# EAGLE board proiect_pcb_v57 (EAGLE 9.7.0)
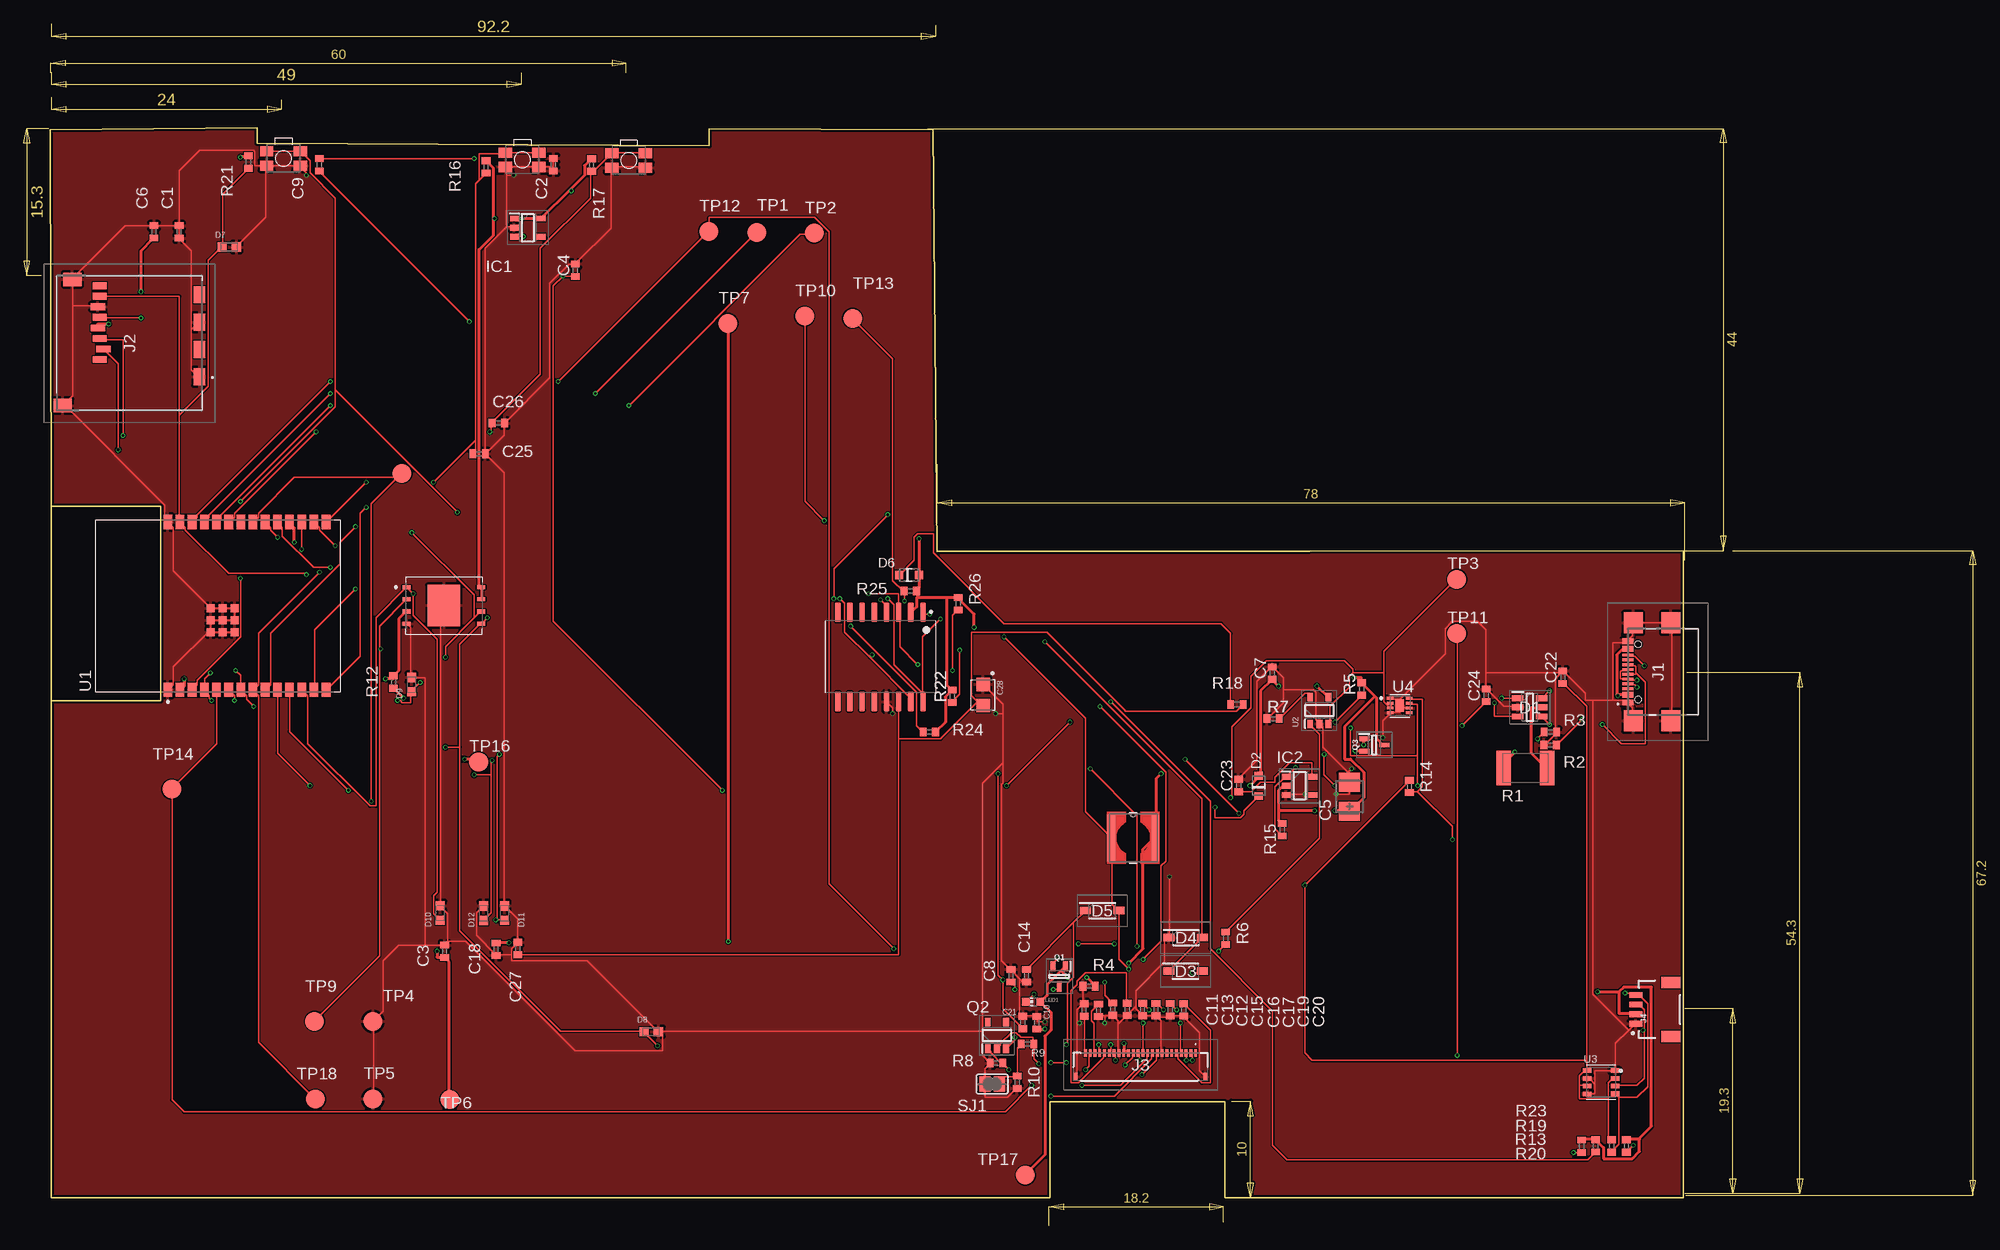
[diagram p0: board, top side]
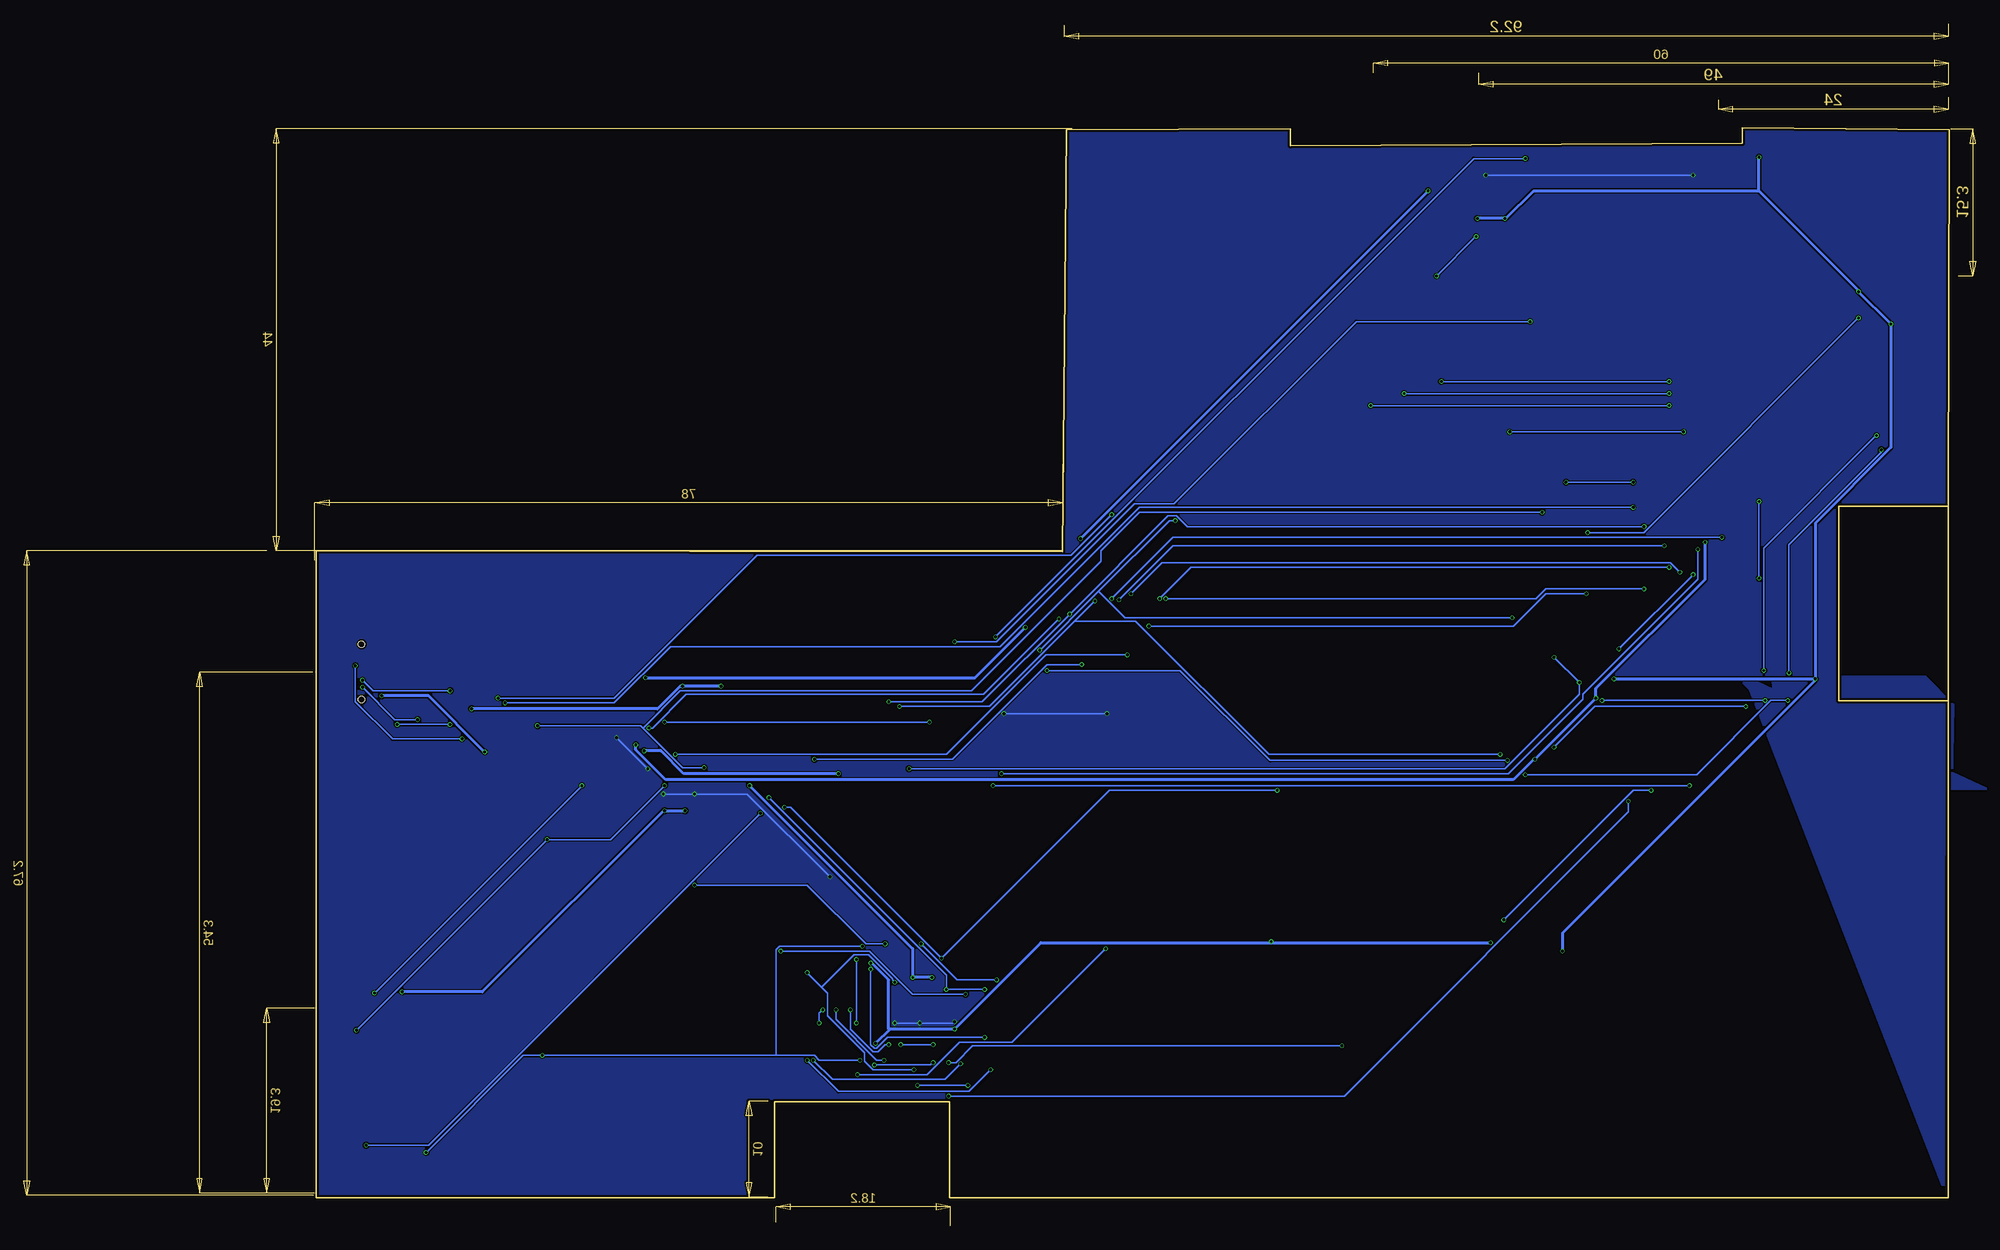
[diagram p1: board, bottom side, seen from below]

Size 170.31 x 111.58 mm. Coordinates in mm from the lower left corner, seen from the top.
Outline: 0.13,51.8 0.13,0 104.27,0 104.27,10.03 122.54,10.03 122.54,0 170.31,0 170.3,67.45 92.52,67.33 92.07,111.32 68.71,111.45 68.71,109.67 21.59,109.92 21.59,111.58 0,111.32 0.13,72.1
Outline: 0.13,51.8 0.13,72.1
Outline: 0.13,72.1 11.56,72.1 11.56,51.8 0.13,51.8
Copper layers (1*16): Top 0.035mm / dielectric 1.6mm / Bottom 0.035mm
Design rules "jlcpcb-2layers.dru": minimum track width 0.15mm, minimum drill 0.3mm, track to track 5mil, track to pad 5mil, pad to pad 5mil, via to via 5mil, smd to smd 5mil, copper to edge 0.2mm, drill to drill 6mil, minimum pad ring 10mil, minimum via ring 3mil, stop-mask expansion 4mil, vias tented up to drill 0mil, thermal gap 10mil
Net classes: 0 default: width 0.15 mm; 1 power: width 0.3 mm

## Footprints (pad centres in the part's own frame; a part is rotated, then mirrored left to right if it is on the bottom)
ESP32_WROVER_EAGLE-LTSPICE_C0402 = smd 0.7 x 0.9: 1 -0.65,0; 2 0.65,0
EAGLE-LTSPICE_C0402 = smd 0.7 x 0.9: 1 -0.65,0; 2 0.65,0
RCL_CT3528 = smd 2 x 2.2: + -1.5,0; - 1.5,0
CAPCP3225X100N = smd 1.4 x 1.4: 1 -1.1,0; 2 1.1,0
SOT95P280X145-6N = smd 1.2 x 0.6: 1 -1.25,0.95; 2 -1.25,0; 3 -1.25,-0.95; 4 1.25,-0.95; 5 1.25,0; 6 1.25,0.95
ESP32_WROVER_AVX---SD0805S020S1R0_AVX_SD0805S020S1R0_0 = smd 0.8 x 0.9: 1 -1.05,0; 2 1.05,0
SOD3716X135N = smd 1.15 x 0.8: 1 -1.75,0; 2 1.75,0
DIOC1608X36N = smd 0.97 x 0.94: 1 -0.75,0; 2 0.75,0
SOT95P280X125-5N = smd 0.9 x 0.6: 1 -1.4,0.95; 2 -1.4,0; 3 -1.4,-0.95; 4 1.4,-0.95; 5 1.4,0.95
SAMACSYS_PARTS_USB4110GFA = smd 0.3 x 1.15: A1 -3.35,3.678; A4 -2.55,3.678; A5 -1.25,3.678; A6 -0.25,3.678; A7 0.25,3.678; A8 1.25,3.678; A9 2.55,3.678; A12 3.35,3.678; B1 3.05,3.678; B4 2.25,3.678; B5 1.75,3.678; B6 0.75,3.678; B7 -0.75,3.678; B8 -1.75,3.678; B9 -2.25,3.678; B12 -3.05,3.678 | smd 2.18 x 2: MP1 -5.11,-0.827; MP2 5.11,-0.827; MP3 -5.11,3.103; MP4 5.11,3.103 | hole 0.65: -2.89,2.603; 2.89,2.603
112ATAARR03ATTEND = smd 1.8 x 1.2: G1 10.6,10.4; G2 4.9,10.4; S1 7.75,10.4; S2 2.05,10.4 | smd 1.4 x 1.9: G3 13.6,-3.85; G4 0.45,-2.85 | smd 0.7 x 1.5: P1 8.8,0; P2 7.7,0.4; P3 6.6,0; P4 5.5,-0.2; P5 4.4,0; P6 3.3,-0.2; P7 2.2,0; P8 1.1,0
FH34SRJ24S05SH99 = smd 0.3 x 0.8: 1 5.75,1.45; 2 5.25,1.45; 3 4.75,1.45; 4 4.25,1.45; 5 3.75,1.45; 6 3.25,1.45; 7 2.75,1.45; 8 2.25,1.45; 9 1.75,1.45; 10 1.25,1.45; 11 0.75,1.45; 12 0.25,1.45; 13 -0.25,1.45; 14 -0.75,1.45; 15 -1.25,1.45; 16 -1.75,1.45; 17 -2.25,1.45; 18 -2.75,1.45; 19 -3.25,1.45; 20 -3.75,1.45; 21 -4.25,1.45; 22 -4.75,1.45; 23 -5.25,1.45; 24 -5.75,1.45 | smd 0.4 x 0.8: MP1 6.75,-1.05; MP2 -6.75,-1.05
JST04_1MM_RA = smd 0.6 x 1.35: 1 -1.5,0; 2 -0.5,0; 3 0.5,0; 4 1.5,0 | smd 1.2 x 2: NC1 2.8,-3.675; NC2 -2.8,-3.675
IND_4828-WE-TPC_WRE = smd 0.889 x 4.826: 1 -2.286,0 | smd 0.762 x 4.826: 2 2.286,0
ADAFRUIT_CHIP-LED0603 = smd 0.8 x 0.8: A 0,-0.75; C 0,0.75
SOT65P210X110-3N = smd 1.05 x 0.5: 1 -1.05,0.65; 2 -1.05,-0.65; 3 1.05,0
ESP32C6_VARISTOR_CT/CN1812 = smd 1.5 x 3.6: 1 -2.25,0; 2 2.25,0
ESP32_WROVER_EAGLE-LTSPICE_R0402 = smd 0.7 x 0.9: 1 -0.65,0; 2 0.65,0
SJ = smd 1.168 x 1.6: 1 -0.762,0; 2 0.762,0
TP20R = smd 2 x 2: TP 0,0
XCVR_ESP32-C6-WROOM-1-N8 = smd 1.5 x 0.9: 1 -8.75,5.26; 2 -8.75,3.99; 3 -8.75,2.72; 4 -8.75,1.45; 5 -8.75,0.18; 6 -8.75,-1.09; 7 -8.75,-2.36; 8 -8.75,-3.63; 9 -8.75,-4.9; 10 -8.75,-6.17; 11 -8.75,-7.44; 12 -8.75,-8.71; 13 -8.75,-9.98; 14 -8.75,-11.25; 15 8.75,-11.25; 16 8.75,-9.98; 17 8.75,-8.71; 18 8.75,-7.44; 19 8.75,-6.17; 20 8.75,-4.9; 21 8.75,-3.63; 22 8.75,-2.36; 23 8.75,-1.09; 24 8.75,0.18; 25 8.75,1.45; 26 8.75,2.72; 27 8.75,3.99; 28 8.75,5.26 | smd 0.8 x 0.8: 29_1 -2.755,0.79; 29_2 -1.505,0.79; 29_3 -0.255,0.79; 29_4 -2.755,-0.46; 29_5 -1.505,-0.46; 29_6 -0.255,-0.46; 29_7 -2.755,-1.71; 29_8 -1.505,-1.71; 29_9 -0.255,-1.71
ESP32_WROVER_BME680_PSON80P300X300X100-8N = smd 1.016 x 0.5: 1 1.458,1.2; 2 1.458,0.4; 3 1.458,-0.4; 4 1.458,-1.2; 5 -1.458,-1.22; 6 -1.458,-0.4; 7 -1.458,0.4; 8 -1.458,1.2
SON50P200X200X80-9N = smd 0.76 x 0.27: 1 -0.985,0.75; 2 -0.985,0.25; 3 -0.985,-0.25; 4 -0.985,-0.75; 5 0.985,-0.75; 6 0.985,-0.25; 7 0.985,0.25; 8 0.985,0.75 | smd 0.9 x 1.3: 9 0,0
SOIC127P1032X265-16N = smd 2.05 x 0.59: 1 -4.655,4.445; 2 -4.655,3.175; 3 -4.655,1.905; 4 -4.655,0.635; 5 -4.655,-0.635; 6 -4.655,-1.905; 7 -4.655,-3.175; 8 -4.655,-4.445; 9 4.655,-4.445; 10 4.655,-3.175; 11 4.655,-1.905; 12 4.655,-0.635; 13 4.655,0.635; 14 4.655,1.905; 15 4.655,3.175; 16 4.655,4.445
SON127P600X800X80-9N = smd 0.94 x 0.44: 1 -3.895,1.905; 2 -3.895,0.635; 3 -3.895,-0.635; 4 -3.895,-1.905; 5 3.895,-1.905; 6 3.895,-0.635; 7 3.895,0.635; 8 3.895,1.905 | smd 3.4 x 4.3: 9 0,0
MYBUTTON = smd 1.4 x 1.05: 1 1.75,0.75; 2 -1.75,0.75; 3 -1.75,-0.75; 4 1.75,-0.75

## Placement (x,y rotation side)
C1  100nF  [ESP32_WROVER_EAGLE-LTSPICE_C0402]  13.47,100.7 90 top
C2  4.7uF  [ESP32_WROVER_EAGLE-LTSPICE_C0402]  52.5,107.7 90 top
C3  4.7uF  [EAGLE-LTSPICE_C0402]  41.15,25.7 90 top
C4  4.7uF  [EAGLE-LTSPICE_C0402]  54.8,96.7 90 top
C5  100uF  [RCL_CT3528]  135.5,41.81 90 top
C6  100nF  [ESP32_WROVER_EAGLE-LTSPICE_C0402]  10.85,100.7 90 top
C7  4.7uF  [ESP32_WROVER_EAGLE-LTSPICE_C0402]  127.45,54.7 90 top
C8  4.7uF  [ESP32_WROVER_EAGLE-LTSPICE_C0402]  100.21,23.15 90 top
C9  4.7uF/25V  [ESP32_WROVER_EAGLE-LTSPICE_C0402]  28.09,107.7 90 top
C10  10uF  [ESP32_WROVER_EAGLE-LTSPICE_C0402]  102.91,18.25 90 top
C11  1uF/50V  [ESP32_WROVER_EAGLE-LTSPICE_C0402]  107.83,19.58 90 top
C12  1uF/50V  [ESP32_WROVER_EAGLE-LTSPICE_C0402]  110.83,19.67 90 top
C13  1uF/50V  [ESP32_WROVER_EAGLE-LTSPICE_C0402]  109.33,19.56 90 top
C14  1uF/50V  [ESP32_WROVER_EAGLE-LTSPICE_C0402]  101.83,23.15 90 top
C15  1uF/50V  [ESP32_WROVER_EAGLE-LTSPICE_C0402]  112.33,19.64 90 top
C16  1uF/50V  [ESP32_WROVER_EAGLE-LTSPICE_C0402]  113.93,19.63 90 top
C17  1uF/50V  [ESP32_WROVER_EAGLE-LTSPICE_C0402]  115.33,19.62 90 top
C18  0.1uF/50V  [ESP32_WROVER_EAGLE-LTSPICE_C0402]  46.53,25.91 90 top
C19  1uF/50V  [ESP32_WROVER_EAGLE-LTSPICE_C0402]  116.83,19.6 90 top
C20  1uF/50V  [ESP32_WROVER_EAGLE-LTSPICE_C0402]  118.23,19.59 90 top
C21  100nF  [ESP32_WROVER_EAGLE-LTSPICE_C0402]  101.45,18.28 90 top
C22  100nF  [ESP32_WROVER_EAGLE-LTSPICE_C0402]  157.75,54.27 90 top
C23  100nF  [ESP32_WROVER_EAGLE-LTSPICE_C0402]  123.95,42.99 90 top
C24  1uF  [ESP32_WROVER_EAGLE-LTSPICE_C0402]  149.75,52.38 90 top
C25  100nF  [ESP32_WROVER_EAGLE-LTSPICE_C0402]  44.75,77.57 0 top
C26  100nF  [ESP32_WROVER_EAGLE-LTSPICE_C0402]  46.75,80.76 0 top
C27  100nF  [ESP32_WROVER_EAGLE-LTSPICE_C0402]  48.78,25.99 90 top
C28  CPH3225A  [CAPCP3225X100N]  97.3,52.43 270 top
D1  USBLC6-2SC6Y  [SOT95P280X145-6N]  154.31,51.13 0 top
D2  ESP32_WROVER_AVX---SD0805S020S1R0_AVX_SD0805S020S1R0_0_0AVX_SD0805S020S1R0_0_0  [ESP32_WROVER_AVX---SD0805S020S1R0_AVX_SD0805S020S1R0_0]  126.04,42.94 90 top
D3  MBR0530  [SOD3716X135N]  118.41,23.63 0 top
D4  MBR0530  [SOD3716X135N]  118.45,27.13 0 top
D5  MBR0530  [SOD3716X135N]  109.71,29.94 0 top
D6  ESP32_WROVER_AVX---SD0805S020S1R0_AVX_SD0805S020S1R0_0_0AVX_SD0805S020S1R0_0_0  [ESP32_WROVER_AVX---SD0805S020S1R0_AVX_SD0805S020S1R0_0]  89.58,64.93 0 top
D7  PGB1010603MR  [DIOC1608X36N]  18.7,99.12 0 top
D8  PGB1010603MR  [DIOC1608X36N]  62.7,17.31 0 top
D9  PGB1010603MR  [DIOC1608X36N]  37.7,53.5 90 top
D10  PGB1010603MR  [DIOC1608X36N]  40.7,29.69 90 top
D11  PGB1010603MR  [DIOC1608X36N]  47.4,29.68 90 top
D12  PGB1010603MR  [DIOC1608X36N]  45.2,29.67 90 top
IC1  XC6220A331MR-G  [SOT95P280X125-5N]  49.82,101.13 0 top
IC2  BD5229G-TR  [SOT95P280X125-5N]  130.29,42.95 0 top
J1  SAMACSYS_PARTS_USB4110-GF-A  [SAMACSYS_PARTS_USB4110GFA]  168.2,54.83 90 top
J2  112A-TAAR-R03_ATTEND  [112ATAARR03ATTEND]  5.19,96.19 270 top
J3  FH34SRJ-24S-0.5SH_99_  [FH34SRJ24S05SH99]  113.72,13.66 0 top
J4  QWIIC_RIGHT_ANGLE  [JST04_1MM_RA]  165.35,19.64 90 top
L1  68uH  [IND_4828-WE-TPC_WRE]  112.96,37.52 0 top
LED1  [ADAFRUIT_CHIP-LED0603]  102.52,20.43 90 top
Q1  20V/4.2A/52mΩ/1.4W  [SOT65P210X110-3N]  105.25,23.08 270 top
Q2  SI1308EDL-T1-GE3  [SOT95P280X125-5N]  98.74,16.94 90 top
Q3  20V/4.2A/52mΩ/1.4W  [SOT65P210X110-3N]  138.1,47.21 0 top
R1  ESP32C6_VARISTORCN1812  [ESP32C6_VARISTOR_CT/CN1812]  153.85,44.81 0 top
R2  5k1  [ESP32_WROVER_EAGLE-LTSPICE_R0402]  156.43,47.19 0 top
R3  5k1  [ESP32_WROVER_EAGLE-LTSPICE_R0402]  156.45,48.55 0 top
R4  100K  [ESP32_WROVER_EAGLE-LTSPICE_R0402]  108.36,22.05 0 top
R5  10K  [ESP32_WROVER_EAGLE-LTSPICE_R0402]  136.77,53.05 90 top
R6  200  [ESP32_WROVER_EAGLE-LTSPICE_R0402]  122.61,27.05 90 top
R7  2K  [ESP32_WROVER_EAGLE-LTSPICE_R0402]  127.54,49.95 0 top
R8  10K  [ESP32_WROVER_EAGLE-LTSPICE_R0402]  98.69,14.05 0 top
R9  0.47  [ESP32_WROVER_EAGLE-LTSPICE_R0402]  101.93,16.05 0 top
R10  2.2  [ESP32_WROVER_EAGLE-LTSPICE_R0402]  100.85,12.05 90 top
R12  10K  [ESP32_WROVER_EAGLE-LTSPICE_R0402]  35.83,53.78 90 top
R13  10K  [ESP32_WROVER_EAGLE-LTSPICE_R0402]  162.85,5.4 90 top
R14  10K  [ESP32_WROVER_EAGLE-LTSPICE_R0402]  141.75,42.89 90 top
R15  10K  [ESP32_WROVER_EAGLE-LTSPICE_R0402]  128.48,38.38 90 top
R16  10K  [ESP32_WROVER_EAGLE-LTSPICE_R0402]  45.48,107.47 90 top
R17  10K  [ESP32_WROVER_EAGLE-LTSPICE_R0402]  56.48,107.66 90 top
R18  15  [ESP32_WROVER_EAGLE-LTSPICE_R0402]  123.78,51.42 0 top
R19  10K  [ESP32_WROVER_EAGLE-LTSPICE_R0402]  161.18,5.41 90 top
R20  10K  [ESP32_WROVER_EAGLE-LTSPICE_R0402]  164.38,5.4 90 top
R21  10K  [ESP32_WROVER_EAGLE-LTSPICE_R0402]  20.7,107.99 90 top
R22  10K  [ESP32_WROVER_EAGLE-LTSPICE_R0402]  94.1,52.28 90 top
R23  10K  [ESP32_WROVER_EAGLE-LTSPICE_R0402]  159.7,5.37 90 top
R24  10K  [ESP32_WROVER_EAGLE-LTSPICE_R0402]  91.7,48.56 0 top
R25  10K  [ESP32_WROVER_EAGLE-LTSPICE_R0402]  89.7,63.25 0 top
R26  10K  [ESP32_WROVER_EAGLE-LTSPICE_R0402]  94.7,61.94 90 top
SJ1  [SJ]  98.25,11.86 0 top
TP1  TPTP20R  [TP20R]  73.7,100.64 0 top
TP2  TPTP20R  [TP20R]  79.7,100.56 0 top
TP3  TPTP20R  [TP20R]  146.7,64.48 0 top
TP4  TPTP20R  [TP20R]  33.7,18.4 0 top
TP5  TPTP20R  [TP20R]  33.7,10.32 0 top
TP6  TPTP20R  [TP20R]  41.7,10.24 0 top
TP7  TPTP20R  [TP20R]  70.7,91.16 0 top
TP9  TPTP20R  [TP20R]  27.6,18.4 0 top
TP10  TPTP20R  [TP20R]  78.7,91.92 0 top
TP11  TPTP20R  [TP20R]  146.7,58.84 0 top
TP12  TPTP20R  [TP20R]  68.7,100.76 0 top
TP13  TPTP20R  [TP20R]  83.7,91.68 0 top
TP14  TPTP20R  [TP20R]  12.7,42.6 0 top
TP15  TPTP20R  [TP20R]  36.7,75.52 0 top
TP16  TPTP20R  [TP20R]  44.7,45.44 0 top
TP17  TPTP20R  [TP20R]  101.7,2.36 0 top
TP18  TPTP20R  [TP20R]  27.7,10.28 0 top
U1  ESP32-C6-WROOM-1-N8  [XCVR_ESP32-C6-WROOM-1-N8]  17.54,61.71 90 top
U2  ESP32_WROVER_SPARKFUN-IC-POWER_MCP73831  [SOT95P280X125-5N]  132.37,50.81 90 top
U3  ESP32_WROVER_BME680_BME680  [ESP32_WROVER_BME680_PSON80P300X300X100-8N]  161.75,12.05 0 top
U4  MAX17048G+T10  [SON50P200X200X80-9N]  140.75,51.31 0 top
U5  DS3231SN#  [SOIC127P1032X265-16N]  86.59,56.39 270 top
U6  W25Q512JVEIQ  [SON127P600X800X80-9N]  41.08,61.75 0 top
U$1  BUTTON_CUSYOMV1  [MYBUTTON]  24.35,108.34 180 top
U$2  BUTTON_CUSYOMV1  [MYBUTTON]  49.25,108.21 180 top
U$3  BUTTON_CUSYOMV1  [MYBUTTON]  60.34,108.15 180 top

## Library data of the parts
C1-C4 C6-C27 = DeskAssistant_v19_v1; SPICEMODEL: NONE; SPICEPREFIX: C
C5 = DeskAssistant_v19_v1; SPICEPREFIX: C
C28 = DeskAssistant_v19_v1; AVAILABILITY: Not in stock; CHECK_PRICES: https://www.snapeda.com/parts/CPH3225A/Seiko+Instruments/view-part/?ref=eda; DESCRIPTION: 11 mF (EDLC) Supercapacitor 3.3 V 1210 (3225 Metric) - -; MF: Seiko Instruments; MP: CPH3225A; PACKAGE: 1210 Seiko; PRICE: None; PURCHASE-URL: https://www.snapeda.com/api/url_track_click_mouser/?unipart_id=562593&manufacturer=Seiko Instruments&part_name=CPH3225A&search_term=None; SNAPEDA_LINK: https://www.snapeda.com/parts/CPH3225A/Seiko+Instruments/view-part/?ref=snap
D1 = DeskAssistant_v19_v1; AVAILABILITY: In Stock; CHECK_PRICES: https://www.snapeda.com/parts/USBLC6-2SC6Y/STMicroelectronics/view-part/?ref=eda; DESCRIPTION: 17V Clamp 5A (8/20µs) Ipp Tvs Diode Surface Mount SOT-23-6; MF: STMicroelectronics; MP: USBLC6-2SC6Y; PACKAGE: SOT-23-6 STMicroelectronics; PRICE: None; SNAPEDA_LINK: https://www.snapeda.com/parts/USBLC6-2SC6Y/STMicroelectronics/view-part/?ref=snap
D2 D6 = DeskAssistant_v19_v1; CENTROID_NOT_SPECIFIED: No; DATASHEET: http://datasheets.avx.com/schottky.pdf; DIGIKEY_DESCRIPTION: DIODE SCHOTTKY 20V 1A 0805; DIGIKEY_PART_NUMBER: 478-7800-1-ND; LEAD_FREE: yes; MF: AVX; MOUSER_PART_NUMBER: 581-SD0805S020S1R0; PACKAGE: 0805 (2012 metric); PREFIX: D; ROHS: yes; TEMPERATURE_RANGE_HIGH: +125°C; TEMPERATURE_RANGE_LOW: -55°C
D3-D5 = DeskAssistant_v19_v1; AVAILABILITY: In Stock; CHECK_PRICES: https://www.snapeda.com/parts/MBR0530/Onsemi/view-part/?ref=eda; DESCRIPTION: Diode Schottky 30 V 500mA Surface Mount SOD-123; MF: ON Semiconductor; MP: MBR0530; PACKAGE: SOD-123-2 ON Semiconductor; PRICE: None; PURCHASE-URL: https://www.snapeda.com/api/url_track_click_mouser/?unipart_id=179458&manufacturer=ON Semiconductor&part_name=MBR0530&search_term=None; SNAPEDA_LINK: https://www.snapeda.com/parts/MBR0530/Onsemi/view-part/?ref=snap
D7-D12 = DeskAssistant_v19_v1; AVAILABILITY: In Stock; CHECK_PRICES: https://www.snapeda.com/parts/PGB1010603MR/Littelfuse/view-part/?ref=eda; DESCRIPTION: 150V (Typ) Clamp - Ipp Tvs Diode Surface Mount 0603 (1608 Metric); MF: Littelfuse Inc.; MP: PGB1010603MR; PACKAGE: 0603 Littelfuse Inc.; PRICE: None; PURCHASE-URL: https://www.snapeda.com/api/url_track_click_mouser/?unipart_id=5659453&manufacturer=Littelfuse Inc.&part_name=PGB1010603MR&search_term=None; SNAPEDA_LINK: https://www.snapeda.com/parts/PGB1010603MR/Littelfuse/view-part/?ref=snap
IC1 = DeskAssistant_v19_v1; DESCRIPTION: LDO Voltage Regulators; HEIGHT: 1.2mm; MANUFACTURER_NAME: Torex; MANUFACTURER_PART_NUMBER: XC6220A331MR-G; MOUSER_PART_NUMBER: 865-XC6220A331MR-G; MOUSER_PRICE-STOCK: https://www.mouser.co.uk/ProductDetail/Torex-Semiconductor/XC6220A331MR-G?qs=AsjdqWjXhJ8ZSWznL1J0gg%3D%3D
IC2 = DeskAssistant_v19_v1; DESCRIPTION: Voltage Detector with Adjustable Delay Time: CMOS processes are utilized to develop high precision, low current consumption CMOS reset ICs that allow arbitrary setting of the delay time. The extensive lineup includes both Nch Open Drain and CMOS output types in a wide range of detection voltages (from 2.3V to 6.0V, in 0.1V steps), enabling selection of the ideal solution based on customer requirements. In addition, the entire series is of course both lead-free and RoHS-compliant.; HEIGHT: 1.25mm; MANUFACTURER_NAME: ROHM Semiconductor; MANUFACTURER_PART_NUMBER: BD5229G-TR; MOUSER_PART_NUMBER: 755-BD5229G-TR; MOUSER_PRICE-STOCK: https://www.mouser.co.uk/ProductDetail/ROHM-Semiconductor/BD5229G-TR?qs=4kLU8WoGk0vvnhrrYwdszw%3D%3D
J1 = DeskAssistant_v19_v1; DESCRIPTION: CONN USB 2.0 TYPE-C R/A SMT; HEIGHT: 3.26mm; MANUFACTURER_NAME: GCT (GLOBAL CONNECTOR TECHNOLOGY); MANUFACTURER_PART_NUMBER: USB4110-GF-A; MOUSER_PART_NUMBER: 640-USB4110-GF-A; MOUSER_PRICE-STOCK: https://www.mouser.co.uk/ProductDetail/GCT/USB4110-GF-A?qs=KUoIvG%2F9IlYiZvIXQjyJeA%3D%3D
J2 = DeskAssistant_v19_v1; DESCRIPTION: Micro SD Card Socket, Push-Push Type, Top Mount, SMT, H=1.83mm, 10u; HEIGHT: 1.9mm; MANUFACTURER_NAME: ATTEND; MANUFACTURER_PART_NUMBER: 112A-TAAR-R03 ATTEND
J3 = DeskAssistant_v19_v1; DESCRIPTION: 24 Position FFC, FPC Connector Contacts, Top and Bottom 0.020" (0.50mm) Surface Mount, Right Angle; HEIGHT: 1.1mm; MANUFACTURER_NAME: Hirose; MANUFACTURER_PART_NUMBER: FH34SRJ-24S-0.5SH(99); MOUSER_PART_NUMBER: 798-FH34SRJ24S05SH99; MOUSER_PRICE-STOCK: https://www.mouser.co.uk/ProductDetail/Hirose-Connector/FH34SRJ-24S-0.5SH99?qs=vcbW%252B4%252BSTIpKBl5ap9J8Fw%3D%3D
J4 = DeskAssistant_v19_v1; PROD_ID: CONN-13694
L1 = DeskAssistant_v19_v1; COPYRIGHT: Copyright (C) 2024 Ultra Librarian. All rights reserved.; MANUFACTURER_PART_NUMBER: 744043680; MFR_NAME: Wurth Electronics
LED1 R1 SJ1 TP1-TP7 TP9-TP18 U$1-U$3 = DeskAssistant_v19_v1
Q1 Q3 = DeskAssistant_v19_v1; PROD_ID: TRAN-14388
Q2 = DeskAssistant_v19_v1; AVAILABILITY: In Stock; CHECK_PRICES: https://www.snapeda.com/parts/SI1308EDL-T1-GE3/Vishay+Siliconix/view-part/?ref=eda; DESCRIPTION: Si1308EDL-T1-GE3 N-channel MOSFET Transistor, 1.5 A, 30 V, 3-Pin SC-70 | Siliconix / Vishay SI1308EDL-T1-GE3; MF: Vishay Siliconix; MP: SI1308EDL-T1-GE3; PACKAGE: SOT-323 Vishay Semiconductor; PRICE: None; PURCHASE-URL: https://www.snapeda.com/api/url_track_click_mouser/?unipart_id=274603&manufacturer=Vishay Siliconix&part_name=SI1308EDL-T1-GE3&search_term=None; SNAPEDA_LINK: https://www.snapeda.com/parts/SI1308EDL-T1-GE3/Vishay+Siliconix/view-part/?ref=snap
R2-R10 R12-R26 = DeskAssistant_v19_v1; SPICEMODEL: NONE; SPICEPREFIX: R
U1 = DeskAssistant_v19_v1; AVAILABILITY: In Stock; CHECK_PRICES: https://www.snapeda.com/parts/ESP32-C6-WROOM-1-N8/Espressif+Systems/view-part/?ref=eda; DESCRIPTION: Multiprotocol Modules ESP32-C6 module, Wi-Fi 6 in 2.4 GHz band, Bluetooth 5, Zigbee 3.0 and Thread. ESP34-WROOM Compatible - ENGINEERING SAMPLE; MF: Espressif Systems; MP: ESP32-C6-WROOM-1-N8; PACKAGE: None; PRICE: None; SNAPEDA_LINK: https://www.snapeda.com/parts/ESP32-C6-WROOM-1-N8/Espressif+Systems/view-part/?ref=snap
U2 = DeskAssistant_v19_v1; PROD_ID: IC-09995
U3 = DeskAssistant_v19_v1; AVAILABILITY: Unavailable; DESCRIPTION: Integrated Environmental Unit; MF: Bosch Sensortec; MP: BME680; PACKAGE: LGA-8 Bosch Tools; PRICE: None
U4 = DeskAssistant_v19_v1; AVAILABILITY: In Stock; CHECK_PRICES: https://www.snapeda.com/parts/MAX17048G+T10/Analog+Devices/view-part/?ref=eda; DESCRIPTION: 3µA 1-Cell/2-Cell Fuel Gauge with ModelGauge; MF: Analog Devices; MP: MAX17048G+T10; PACKAGE: TDFN-8 Maxim; PRICE: None; PURCHASE-URL: https://www.snapeda.com/api/url_track_click_mouser/?unipart_id=329239&manufacturer=Analog Devices&part_name=MAX17048G+T10&search_term=None; SNAPEDA_LINK: https://www.snapeda.com/parts/MAX17048G+T10/Analog+Devices/view-part/?ref=snap
U5 = DeskAssistant_v19_v1; AVAILABILITY: In Stock; CHECK_PRICES: https://www.snapeda.com/parts/DS3231SN%23/Analog+Devices/view-part/?ref=eda; DESCRIPTION: Extremely Accurate I²C-Integrated RTC/TCXO/Crystal; MF: Analog Devices; MP: DS3231SN#; PACKAGE: SOIC-16 Maxim; PRICE: None; PURCHASE-URL: https://www.snapeda.com/api/url_track_click_mouser/?unipart_id=99048&manufacturer=Analog Devices&part_name=DS3231SN#&search_term=None; SNAPEDA_LINK: https://www.snapeda.com/parts/DS3231SN%23/Analog+Devices/view-part/?ref=snap
U6 = DeskAssistant_v19_v1; AVAILABILITY: In Stock; CHECK_PRICES: https://www.snapeda.com/parts/W25Q512JVEIQ/Winbond+Electronics/view-part/?ref=eda; DESCRIPTION: FLASH - NOR Memory IC 512Mb (64M x 8) SPI - Quad I/O 133 MHz 8-WSON (8x6); MF: Winbond Electronics; MP: W25Q512JVEIQ; PACKAGE: Package; PRICE: None; SNAPEDA_LINK: https://www.snapeda.com/parts/W25Q512JVEIQ/Winbond+Electronics/view-part/?ref=snap

## Nets
3V3 [power]: C3.1 C5.+ C6.1 D6.2 IC1.5 IC2.2 J2.P4 J4.2 Q3.3 R5.2 R12.2 R15.2 R16.2 R17.2 R19.2 R20.2 R21.2 R22.2 R23.2 R24.2 R25.2 R26.2 TP6.TP U1.2 U5.2 U6.3 U6.7 U6.8
32KHZ: R19.1 U1.9 U5.1
DN: D1.6 J1.A7 J1.B7
DP: D1.4 J1.A6 J1.B6
EPD_3V3 [power]: C10.1 C18.2 J3.15 J3.16 L1.2 Q3.2 TP7.TP
EPD_3V3_C [power]: Q3.1 R12.1 TP16.TP U1.18
EPD_BUSY: J3.9 TP12.TP U1.26
EPD_CS: D11.1 J3.12 R25.1 TP13.TP U1.11
EPD_DC: J3.11 TP14.TP U1.5
EPD_RST: J3.10 TP15.TP U1.21
FLASH_CS: D10.1 R24.1 U1.12 U6.1
GDR: J3.2 Q2.1 R8.2
GND: C1.1 C1.2 C2.1 C2.2 C3.2 C4.2 C5.- C6.2 C7.2 C8.2 C10.2 C11.2 C12.1 C13.1 C14.1 C15.1 C16.1 C17.1 C18.1 C19.1 C20.1 C21.2 C22.2 C23.2 C24.2 C25.2 C26.2 C27.2 C28.1 D1.2 D4.1 D7.2 D8.2 D9.2 D10.2 D11.2 D12.2 IC1.2 IC2.3 J1.A1 J1.A12 J1.B1 J1.B12 J1.MP1 J1.MP2 J1.MP3 J1.MP4 J2.G1 J2.G2 J2.G3 J2.G4 J2.P6 J3.8 J3.17 J3.MP1 J3.MP2 J4.1 R2.1 R3.2 R4.1 R7.1 R8.1 R10.1 SJ1.1 TP4.TP TP5.TP U1.1 U1.28 U1.29_1 U1.29_2 U1.29_3 U1.29_4 U1.29_5 U1.29_6 U1.29_7 U1.29_8 U1.29_9 U2.2 U3.1 U3.5 U3.7 U4.1 U4.4 U4.6 U4.9 U5.13 U6.4 U6.9 U$1.1 U$1.2 U$2.1 U$2.2 U$3.1 U$3.2
GPIO8: R5.1 U1.10
I2C_PW: C21.1 C22.1 R13.2 R14.2 U1.17 U3.2 U3.6 U3.8
INT_RTC: R20.1 TP18.TP U1.8 U5.3
IO/BOOT: C25.1 R16.1 U1.15 U$2.3 U$2.4
IO/CHANGE: C26.1 R17.1 U1.23 U$3.3 U$3.4
MISO: D7.1 J2.P7 R21.1 TP9.TP U1.27 U6.2
MOSI: D8.1 J2.P3 J3.14 R22.1 TP10.TP U1.7 U6.5
N$1: J1.A5 R2.2
N$2: J1.B5 R3.1
N$3: C11.1 J3.24
N$12: C4.1 D2.1 IC1.1 IC1.3 Q1.2
N$43: R6.2 U2.1
N$44: LED1.C R6.1
N$45: R7.2 U2.5
N$49: C9.1 D3.1 D4.2
N$60: C13.2 J3.22
N$62: C15.2 J3.20
N$63: C16.2 J3.19
N$64: C17.2 J3.18
N$66: C19.2 J3.4
N$75: C20.2 J3.5
N$85: C23.1 IC2.5
N$98: D6.1 R18.1
PREVGH: C14.2 D5.1 J3.21
PREVGL: C12.2 D3.2 J3.23
RESE: J3.3 Q2.2 R9.2
RESE': R9.1 R10.2 SJ1.2
RESET: C24.1 IC2.1 R15.1 U1.3 U$1.3 U$1.4
RTC_RST: U1.16 U5.4
RX: TP2.TP U1.24
SCK: D9.1 J2.P5 J3.13 R23.1 TP11.TP U1.6 U6.6
SCL: J4.4 R13.1 U1.20 U3.4 U4.7 U5.16
SDA: J4.3 R14.1 U1.19 U3.3 U4.8 U5.15
SRC: C9.2 D5.2 L1.1 Q2.3
SS_SD: D12.1 J2.P2 R26.1 U1.4
TX: TP1.TP U1.25
USB_D+: D1.3 U1.14
USB_D-: D1.1 U1.13
VBAT: C8.1 Q1.3 TP3.TP U2.3 U4.2 U4.3
VBUS [power]: C7.1 D1.5 D2.2 LED1.A Q1.1 R1.2 R4.2 TP17.TP U2.4
VRTC: C27.1 C28.2 R18.2 U5.14
VUSB [power]: J1.A4 J1.A9 J1.B4 J1.B9 R1.1

## Tracks (layer width: path | path; a pad name or v marks a point on that pad's centre or on a via)
3V3  (via drill 0.3)
  Top 0.3: R23.2 159.74,6.09 161.11,6.09 R19.2 161.24,5.97 161.99,5.22 161.99,4.09 164.99,4.09 165.74,4.84 165.74,6.09 | 165.74,6.09 164.49,6.09 R20.2 | 163.61,21.47 163.61,19.22 165.24,19.22 J4.2 | 163.61,21.47 164.11,21.97 166.99,21.97 166.99,7.47 165.74,6.22 165.74,6.09 | R24.2 92.36,48.59 93.36,49.59 93.36,52.22 93.99,52.84 R22.2 93.99,52.97 93.49,53.47 93.49,62.59 | 90.49,62.59 93.49,62.59 | 93.49,62.59 94.61,62.59 R26.2 94.74,62.47 96.36,60.84 v96.36,59.47 | 90.49,62.59 90.49,63.22 R25.2 90.36,63.34 90.61,63.59 90.61,64.84 D6.2 90.61,64.97 v90.61,68.72 | U5.2 89.86,61.09 90.36,61.59 90.36,62.59 90.49,62.59 | 128.11,40.34 128.11,42.47 128.49,42.84 128.86,42.84 IC2.2 | 128.11,40.34 128.11,39.34 128.36,39.09 R15.2 | 138.17,52.28 138.36,52.09 138.36,47.84 139.11,47.09 Q3.3 | 138.17,52.28 136.86,53.59 R5.2 136.74,53.84 136.74,54.22 v135.99,54.22 | 138.17,52.28 134.99,49.09 134.99,45.72 135.61,45.72 136.99,44.34 136.99,41.72 135.61,40.34 C5.+ 135.36,40.34 v133.99,40.34 | v131.86,40.34 128.11,40.34 | v161.36,21.47 163.61,21.47 | TP6.TP 41.61,10.34 41.61,24.59 41.24,24.97 C3.1 41.11,25.09 40.36,25.09 v40.36,25.72 | U6.3 37.11,61.09 36.36,60.34 36.36,54.97 35.86,54.47 R12.2 35.74,54.34 35.74,54.09 v34.99,54.09 | v13.99,54.09 13.99,53.34 13.61,52.97 U1.2 | v9.49,94.47 9.49,98.72 10.74,99.97 C6.1 | v6.11,91.09 4.99,91.09 4.99,90.72 J2.P4 | v19.86,108.47 19.86,108.59 20.61,108.59 R21.2 | 54.18,105.03 55.74,106.59 55.74,107.59 56.36,108.22 R17.2 | 54.18,105.03 51.24,102.09 IC1.5 51.11,102.09 v49.24,102.09 | 46.24,102.09 46.24,100.34 44.74,98.84 44.74,63.84 44.86,63.72 U6.8 44.99,63.59 44.99,62.47 U6.7
  Top 0.3: 46.24,102.09 46.24,107.34 45.49,108.09 R16.2 | v46.36,102.09 46.24,102.09 | v54.36,104.97 54.24,104.97 54.18,105.03
  Bottom 0.3: v131.86,40.34 v133.99,40.34 134.11,40.34 152.99,21.47 v161.36,21.47 | v96.36,59.47 101.61,54.22 v135.99,54.22 | v34.99,54.09 v13.99,54.09 | v40.36,25.72 40.36,27.59 13.99,53.97 v13.99,54.09 | 19.86,104.97 v19.86,108.47 | 19.86,104.97 9.49,94.59 v9.49,94.47 v6.11,91.09 6.11,78.22 13.99,70.34 v13.99,54.09 | v49.24,102.09 v46.36,102.09 46.24,102.09 43.36,104.97 19.86,104.97 | v54.36,104.97 v90.61,68.72
32KHZ  (via drill 0.3)
  Top 0.15: v110.61,51.72 120.99,41.34 120.99,25.97 127.49,19.47 127.49,5.47 128.99,3.97 160.36,3.97 161.11,4.72 R19.1 | v91.74,60.84 91.11,60.84 91.11,60.97 U5.1 | v31.86,69.97 30.24,68.34 30.24,66.09 22.99,58.84 22.99,53.47 22.49,52.97 U1.9
  Bottom 0.15: v110.61,51.72 100.86,51.72 v91.74,60.84 81.49,71.09 80.61,71.09 79.49,69.97 v31.86,69.97
DN  (via drill 0.3)
  Top 0.15: J1.A7 164.49,54.97 163.86,54.97 163.74,54.84 163.74,54.09 164.49,54.09 J1.B7 164.61,53.97 v165.49,53.97 | v156.36,52.84 155.61,52.09 D1.6
  Bottom 0.15: v156.36,52.84 164.36,52.84 v165.49,53.97
DP  (via drill 0.3)
  Top 0.15: 165.36,54.72 165.36,55.34 165.24,55.47 164.61,55.47 J1.B6 | 165.36,54.72 165.36,54.59 164.61,54.59 J1.A6 | v156.36,49.34 155.61,50.09 D1.4 | v161.86,49.34 163.86,47.34 166.36,47.34 166.36,53.72 165.36,54.72
  Bottom 0.15: v161.86,49.34 v156.36,49.34
EPD_3V3  (via drill 0.3)
  Top 0.3: v136.11,46.59 136.99,46.59 Q3.2 | v115.86,44.22 115.36,43.72 115.36,37.59 L1.2 115.11,37.47 113.99,36.34 113.99,25.97 v112.49,24.47 | J3.15 112.36,15.22 111.99,15.22 J3.16 111.99,15.34 v111.99,16.09 | v47.86,26.59 46.61,26.59 C18.2 | v103.74,17.59 102.99,17.59 C10.1 | v70.74,26.72 70.74,91.09 TP7.TP
  Bottom 0.3: v136.11,46.59 134.36,46.59 131.99,44.22 v115.86,44.22 | 70.74,26.59 94.74,26.59 v103.74,17.59 110.49,17.59 110.55,17.53 | 70.74,26.59 v47.86,26.59 | 110.55,17.53 v111.99,16.09 | v70.74,26.72 70.74,26.59 | v112.49,24.47 112.36,24.47 110.61,22.72 110.61,17.59 110.55,17.53
EPD_3V3_C  (via drill 0.3)
  Top 0.3: v36.86,52.09 R12.1 | v43.24,45.72 44.61,45.72 44.61,45.47 TP16.TP | v136.99,47.22 136.99,47.84 Q3.1 | v25.49,68.34 25.49,69.84 24.99,70.34 U1.18
  Bottom 0.3: v136.99,47.22 136.99,46.72 133.86,43.59 45.49,43.59 43.36,45.72 v43.24,45.72 v36.86,52.09 36.86,53.09 25.49,64.47 v25.49,68.34
EPD_BUSY  (via drill 0.3)
  Top 0.15: v113.86,12.84 115.36,14.34 115.36,15.09 J3.9 | v87.99,25.97 81.24,32.72 81.24,100.72 79.74,102.22 68.74,102.22 68.74,100.84 TP12.TP 68.61,100.72 v52.99,85.09 | v29.24,85.09 15.36,71.22 15.36,70.97 14.86,70.47 U1.26
  Bottom 0.15: v113.86,12.84 106.61,12.84 103.24,16.22 97.74,16.22 v87.99,25.97 | v52.99,85.09 v29.24,85.09
EPD_CS  (via drill 0.3)
  Top 0.15: 46.61,28.97 47.36,28.97 D11.1 | v31.11,42.47 24.99,48.59 24.99,52.84 U1.11 | v113.99,18.22 113.99,15.22 J3.12 | v113.99,24.84 115.86,26.72 115.86,34.59 116.36,35.09 116.36,44.34 v109.49,51.22 | v89.11,62.22 89.11,63.22 R25.1 88.99,63.22 87.86,64.34 87.86,87.47 83.74,91.59 TP13.TP | 46.61,28.97 46.61,45.97 v46.86,46.22 | 46.61,28.97 v46.49,28.97
  Bottom 0.15: v46.49,28.97 32.99,42.47 v31.11,42.47 | v113.99,24.84 v113.99,18.22 | v109.49,51.22 100.11,51.22 91.24,60.09 | v89.11,62.22 91.24,60.09 | v46.86,46.22 70.99,46.22 84.86,60.09 91.24,60.09
EPD_DC  (via drill 0.3)
  Top 0.15: v107.61,11.72 111.61,11.72 114.36,14.47 114.36,15.09 J3.11 | v102.36,11.72 99.61,8.97 13.99,8.97 12.74,10.22 12.74,42.59 TP14.TP 12.74,42.72 17.36,47.34 17.36,52.84 U1.5
  Bottom 0.15: v102.36,11.72 v107.61,11.72
EPD_RST  (via drill 0.3)
  Top 0.15: v104.36,10.59 110.99,10.59 114.86,14.47 114.86,15.09 J3.10 | v33.49,41.34 33.49,72.34 36.24,75.09 | 36.24,75.09 36.61,75.47 TP15.TP 36.24,75.09 | 36.24,75.09 25.49,75.09 21.74,71.34 21.74,70.97 21.24,70.47 U1.21
  Bottom 0.15: v104.36,10.59 63.11,10.59 33.49,40.22 v33.49,41.34
FLASH_CS  (via drill 0.3)
  Top 0.15: v83.49,59.59 90.36,52.72 90.36,49.22 90.99,48.59 R24.1 | D10.1 40.61,28.97 39.99,29.59 39.99,31.47 40.36,31.84 40.36,58.22 37.86,60.72 v37.86,62.97 37.24,63.59 U6.1 37.11,63.59 33.99,60.47 33.99,40.84 33.36,40.84 26.86,47.34 26.86,52.34 26.36,52.84 U1.12
  Bottom 0.15: v83.49,59.59 45.49,59.59 42.11,62.97 v37.86,62.97
GDR  (via drill 0.3)
  Top 0.15: v119.11,14.34 119.11,14.97 118.99,15.09 J3.2 | v99.99,13.34 99.36,13.97 R8.2 99.24,13.97 98.11,15.09 98.11,15.22 97.86,15.47 Q2.1
  Bottom 0.15: v119.11,14.34 115.86,11.09 102.24,11.09 v99.99,13.34
GND  (via drill 0.3)
  Top 0.15: 16.74,59.22 16.74,60.09 U1.29_2 16.86,60.22 17.99,60.22 U1.29_5 18.11,60.22 19.24,60.22 | 16.74,59.22 16.74,58.97 U1.29_1 | U1.29_1 16.86,58.97 17.99,58.97 U1.29_4 18.11,58.97 19.24,58.97 U1.29_7 | 16.74,59.22 12.86,55.34 12.86,53.47 12.36,52.97 U1.1 | 16.74,59.22 U1.29_1 | 19.24,60.22 19.24,61.34 U1.29_9 19.24,61.47 18.11,61.47 U1.29_6 17.99,61.47 16.86,61.47 U1.29_3 16.74,61.47 12.86,65.34 12.86,69.84 12.36,70.34 U1.28 12.24,70.47 11.99,70.72 11.99,72.22 1.49,82.72 | 19.24,60.22 U1.29_8 | 2.36,92.97 4.86,92.97 J2.P6 | 2.36,92.97 2.36,95.72 J2.G4 2.36,95.84 7.86,101.34 10.74,101.34 C6.2 10.86,101.34 13.36,101.34 C1.2 | 1.49,82.72 2.36,83.59 2.36,92.97 | 1.49,82.72 1.36,82.59 J2.G3 1.49,82.72 | D7.2 19.49,99.22 22.49,102.22 22.49,107.47 U$1.1 | U$1.1 22.61,107.59 25.99,107.59 U$1.2 26.11,107.47 26.74,106.84 v26.74,106.59 | C1.2 13.49,101.34 13.49,100.09 C1.1 13.49,99.97 14.74,98.72 14.74,90.47 | 14.74,90.47 14.74,86.34 15.49,85.59 J2.G1 | 14.74,90.47 15.49,91.22 J2.G2 | U$1.1 22.49,107.59 21.36,107.59 21.36,109.06 21.23,109.19 15.62,109.19 13.49,107.06 13.49,101.47 C1.2 | 140.74,51.09 140.74,51.22 U4.9 | 140.74,51.09 140.74,50.59 139.86,50.59 U4.4 139.74,50.47 138.99,49.72 v138.99,47.97 | 140.74,51.09 141.61,51.09 U4.6 | 140.74,51.09 U4.9 | 140.74,51.97 139.86,51.97 U4.1 | 140.74,51.97 140.74,51.34 U4.9 | D1.2 152.99,51.22 151.61,51.22 149.86,52.97 C24.2 149.74,53.09 149.74,54.72 | 140.74,51.97 145.49,56.72 145.49,59.34 146.24,60.09 148.86,60.09 149.74,59.22 149.74,54.72 | J1.MP1 169.11,49.72 169.11,59.84 J1.MP2 168.99,59.97 165.11,59.97 J1.MP4 164.99,59.84 164.99,58.59 164.61,58.22 J1.A12 164.49,58.09 164.49,57.97 J1.B1 164.49,57.84 162.99,57.84 162.99,51.84
  Top 0.15: 161.11,11.84 161.11,10.84 160.36,10.84 U3.5 | 161.11,11.84 160.61,12.34 160.36,12.34 U3.7 | 161.11,11.84 161.11,13.22 163.11,13.22 U3.1 163.24,13.34 163.24,16.09 164.61,17.47 | 164.61,17.47 165.24,18.09 J4.1 | J1.MP3 164.99,49.72 164.99,51.09 164.61,51.47 J1.A1 164.49,51.59 164.49,51.72 J1.B12 164.49,51.84 162.99,51.84 | R2.1 155.86,47.22 156.99,48.34 156.99,48.47 R3.2 156.99,48.59 156.99,54.09 157.61,54.72 | 157.61,54.72 157.74,54.84 C22.2 | 160.86,51.84 160.11,51.84 160.11,52.59 157.86,54.84 C22.2 | 160.86,51.84 162.99,51.84 | 164.61,17.47 160.86,21.22 160.86,51.84 | 157.61,54.72 149.74,54.72 | 157.61,54.72 C22.2 | v130.86,42.09 128.99,42.09 IC2.3 | v134.11,42.09 135.49,42.09 135.49,43.22 C5.- 135.49,43.34 135.49,44.22 135.36,44.34 | 135.36,44.34 132.74,46.97 132.74,49.09 132.49,49.34 U2.2 132.36,49.47 131.99,49.84 131.99,52.72 131.74,52.97 128.61,52.97 | C23.2 123.99,43.72 125.86,45.59 125.86,53.84 127.36,55.34 C7.2 127.49,55.34 128.61,54.22 128.61,52.97 | 128.61,52.97 128.61,51.59 126.99,49.97 R7.1 | 107.11,18.22 107.11,19.59 107.74,20.22 C11.2 107.74,20.34 107.74,21.97 R4.1 | 107.11,18.22 107.11,12.84 106.99,12.72 J3.MP2 | J3.MP1 120.36,12.72 119.86,13.22 119.86,17.22 118.24,18.84 C20.1 118.11,18.97 116.86,18.97 C19.1 116.74,18.84 115.49,18.84 | 111.36,18.09 111.36,18.47 110.86,18.97 C12.1 110.74,18.97 109.99,18.97 | 111.36,18.09 111.36,15.22 J3.17 | 109.99,18.97 109.36,18.97 C13.1 | 111.36,18.09 112.24,18.97 C15.1 112.36,19.09 113.24,19.97 | 115.49,18.84 115.36,18.97 C17.1 | 115.49,18.84 115.86,18.47 115.86,15.22 J3.8 | C17.1 113.99,18.97 C16.1 113.86,19.09 113.24,19.72 113.24,19.97
  Top 0.15: 113.24,19.97 113.24,21.59 116.24,24.59 116.24,26.72 116.61,27.09 D4.1 116.74,27.22 v116.74,33.47 | 115.49,18.84 C17.1 | v107.36,18.22 107.11,18.22 | 109.99,18.97 v109.99,18.22 | U6.4 37.24,59.84 37.61,59.47 37.61,54.34 D9.2 37.74,54.22 39.11,54.22 39.11,26.34 | 41.49,26.72 41.24,26.47 C3.2 41.11,26.34 39.11,26.34 | 41.49,26.72 41.49,29.59 40.74,30.34 D10.2 40.74,30.47 40.74,61.47 40.99,61.72 U6.9 | TP5.TP 33.74,10.34 33.74,18.34 TP4.TP 33.74,18.47 34.74,19.47 34.74,24.72 36.36,26.34 39.11,26.34 | 52.49,107.47 C2.2 | 52.49,107.47 52.49,107.09 C2.1 | 52.49,107.47 51.11,107.47 U$2.2 47.61,107.47 U$2.1 47.61,107.34 47.61,106.59 | 47.61,101.22 48.36,101.22 IC1.2 | 47.61,106.59 47.61,101.22 | C25.2 45.49,77.59 47.36,79.47 47.36,80.72 C26.2 47.49,80.84 52.11,85.47 52.11,95.34 54.11,97.34 54.74,97.34 C4.2 54.86,97.47 58.49,101.09 58.49,107.34 U$3.1 58.61,107.47 61.99,107.47 U$3.2 | 47.61,101.22 45.36,98.97 45.36,77.59 C25.2 | 48.11,25.34 46.61,25.34 C18.1 46.49,25.34 44.49,27.34 44.49,29.72 45.11,30.34 D12.2 | 48.11,25.34 48.11,25.97 48.74,26.59 C27.2 48.74,26.72 48.74,29.09 47.49,30.34 D11.2 47.36,30.47 47.36,75.59 45.49,77.47 C25.2 | 48.11,25.34 48.11,24.72 55.99,24.72 63.36,17.34 D8.2 | R10.1 100.74,11.34 99.86,10.47 97.49,10.47 97.49,11.84 SJ1.1 97.49,11.97 97.49,13.47 97.99,13.97 R8.1 97.99,14.09 97.24,14.84 97.24,17.34 | 101.11,22.84 101.36,22.59 101.74,22.59 C14.1 | 101.11,22.84 100.24,23.72 C8.2 100.11,23.84 99.24,24.72 99.24,43.09 99.36,43.22 99.36,45.34 | 101.11,22.84 101.11,19.22 101.36,18.97 C21.2 101.49,18.97 102.86,18.97 C10.2 102.99,18.84 102.99,18.34 v103.74,18.34
  Top 0.15: 99.36,45.34 99.36,50.47 | 99.36,50.47 99.36,51.47 97.36,53.47 C28.1 | U5.13 87.86,51.09 v87.86,50.47 | 99.36,50.47 v98.61,50.47 | 97.24,17.34 97.24,43.22 99.36,45.34 | 97.24,17.34 63.86,17.34 | 63.86,17.34 63.49,17.34 D8.2 | 41.49,26.72 43.36,26.72 54.74,15.34 63.86,15.34 63.86,17.34 | 63.86,17.34 D8.2 | 135.36,44.34 v135.74,44.72 | 47.61,106.59 v48.36,106.59
  Bottom 0.15: v134.11,42.09 v130.86,42.09 125.36,42.09 v116.74,33.47 | v109.99,18.22 v107.36,18.22 103.86,18.22 v103.74,18.34 | v98.61,50.47 v87.86,50.47 | v135.74,44.72 v138.99,47.97 | v48.36,106.59 v26.74,106.59
  pour Top: -11.54,-15.38 214.12,-15.38 213.36,-14.61 213.34,-14.56 213.34,134.32 -11.36,134.32 -12.36,-16.17 -11.6,-15.4
  pour Top: 22.64,35.62 49.12,35.62 48.36,36.39 48.34,36.44 48.34,112.32 22.64,112.32
  pour Top: 53.55,26.62 83.34,26.62 84.34,104.32 62.55,104.32 50.64,92.41 50.64,29.53
  pour Top: 4.64,7.44 4.61,7.39 3.84,6.61 39.11,5.63 29.36,15.39 29.34,15.44 29.34,82.32 13.64,82.32 13.64,48.44 13.61,48.39 4.64,39.41
  pour Top: 77.66,75.32 84.59,33.78 102.34,51.53 102.34,62.41 89.42,75.32
  pour Top: 94.64,9.62 159.42,9.62 165.34,15.53 165.34,56.41 164.42,57.33 127.48,61.32 95.55,61.32 94.64,60.41
  pour Bottom: 171.42,-8.38 175.34,-4.47 175.34,79.5 175.36,79.55 197.27,101.47 172.42,126.32 -4.37,126.32 -6.36,-8.38
  pour Bottom: -1.3,-3.38 104.34,-3.38 104.34,54.41 83.42,75.32 27.55,75.32 26.62,74.39
  pour Bottom: -0.36,51.41 0.34,16.47 0.34,35.5 0.36,35.55 19.12,54.32 2.55,54.32
  pour Bottom: 0.64,33.41 0.64,1.27 21.09,53.86
  pour Bottom: -3.83,42.62 10.42,42.62 22.78,54.98
  pour Bottom: 0.64,32.83 15.12,47.32 1.46,47.32 1.4,47.34 0.64,48.11
  pour Bottom: 90.64,67.32 91.63,9.62 149.52,9.62 149.57,9.6 153.34,5.83 153.34,18.41 131.36,40.39 131.34,40.44 131.34,67.32
  pour Bottom: 12.4,51.6 12.46,51.62 18.34,51.62 18.34,72.32 11.64,72.32 11.64,50.83
  pour Bottom: 145.52,38.62 145.57,38.6 146.32,37.85 145.34,61.32 124.64,61.32 124.64,38.62
  pour Bottom: 149.7,41.62 159.42,41.62 168.27,50.47 159.42,59.32 155.6,59.32
GPIO8  (via drill 0.3)
  Top 0.15: v133.99,49.59 136.74,52.34 R5.1 | v99.74,42.97 v106.36,49.59 | v27.11,42.97 23.74,46.34 23.74,52.84 U1.10
  Bottom 0.15: v106.36,49.59 v133.99,49.59 | v27.11,42.97 v99.74,42.97
I2C_PW  (via drill 0.3)
  Top 0.15: 162.49,10.34 162.49,11.97 162.86,12.34 163.11,12.34 U3.2 | 162.49,10.34 162.49,6.34 162.74,6.09 R13.2 | 160.24,13.47 160.24,13.34 U3.8 160.24,13.47 | 160.24,13.47 160.24,14.34 | 160.24,14.34 160.24,51.22 157.86,53.59 C22.1 | 159.49,11.72 160.24,11.72 U3.6 | 159.49,11.72 159.49,12.72 160.24,13.47 | 162.49,10.34 159.49,10.34 159.49,11.72 | v110.99,26.47 v107.24,26.47 | C21.1 101.36,17.72 99.36,19.72 v99.36,22.72 98.86,23.22 v98.86,44.22 | R14.2 141.74,43.47 v130.86,32.59 130.86,15.09 131.61,14.34 160.24,14.34 | v26.24,67.59 26.24,70.34 U1.17
  Bottom 0.15: v99.36,22.72 103.49,22.72 v107.24,26.47 | v110.99,26.47 112.99,26.47 119.11,32.59 v130.86,32.59 | v26.24,67.59 26.24,64.47 38.24,52.47 38.24,51.97 45.99,44.22 v98.86,44.22
INT_RTC  (via drill 0.3)
  Top 0.15: TP18.TP 27.61,10.34 21.74,16.22 21.74,52.34 21.24,52.84 U1.8 21.24,52.97 21.74,53.47 21.74,58.84 v28.11,65.22 | v165.11,5.47 164.49,4.84 R20.1 | v118.36,45.72 v123.99,40.09 | v90.49,55.59 88.61,57.47 88.61,60.97 U5.3 88.49,61.09 88.49,62.97 v85.36,62.97
  Bottom 0.15: v165.11,5.47 158.61,5.47 v123.99,40.09 | v118.36,45.72 103.99,45.72 94.11,55.59 v90.49,55.59 | v28.11,65.22 29.11,66.22 82.11,66.22 v85.36,62.97
IO/BOOT  (via drill 0.3)
  Top 0.15: U$2.3 47.61,108.97 U$2.4 47.49,108.84 44.74,108.84 44.74,106.09 | 44.36,78.97 44.36,105.72 44.74,106.09 | 44.36,78.97 44.36,77.84 44.11,77.59 C25.1 | 44.74,106.09 45.36,106.72 R16.1 | v32.99,74.59 28.86,70.47 U1.15 | 44.36,78.97 v39.99,74.59
  Bottom 0.15: v39.99,74.59 v32.99,74.59
IO/CHANGE  (via drill 0.3)
  Top 0.15: 56.36,106.72 56.36,106.97 R17.1 56.36,106.72 | 56.36,106.72 56.36,104.22 51.11,98.97 51.11,85.84 46.11,80.84 C26.1 45.99,80.72 45.99,79.97 v45.86,79.84 | 56.36,106.72 58.49,108.84 U$3.4 58.61,108.97 61.99,108.97 U$3.3 | v27.74,79.84 19.24,71.34 19.24,70.97 18.74,70.47 U1.23
  Bottom 0.15: v45.86,79.84 v27.74,79.84
MISO  (via drill 0.3)
  Top 0.15: R21.1 20.61,107.22 17.99,104.59 17.99,99.22 D7.1 17.86,99.09 16.49,97.72 16.49,84.59 13.49,81.59 | 13.49,81.59 13.49,70.47 U1.27 13.61,70.34 14.11,69.84 14.11,69.59 18.61,65.09 26.74,65.09 v26.74,64.97 | 13.49,81.59 13.49,93.97 5.24,93.97 J2.P7 | 34.36,57.22 34.36,25.22 27.61,18.47 TP9.TP | 34.36,57.22 34.36,59.59 37.11,62.34 U6.2 | 34.36,57.22 v34.49,57.22
  Bottom 0.15: v34.49,57.22 v26.74,64.97
MOSI  (via drill 0.3)
  Top 0.15: v94.86,57.09 94.86,52.47 94.11,51.72 R22.1 | v80.74,70.59 78.74,72.59 78.74,91.84 TP10.TP | v112.11,13.84 112.86,14.59 112.86,15.09 J3.14 | v104.36,14.09 v105.99,14.09 | v63.36,15.84 61.99,17.22 D8.1 61.86,17.34 53.24,17.34 42.74,27.84 42.74,46.97 | 42.74,46.97 42.74,57.72 44.86,59.84 U6.5 44.99,59.84 v45.61,60.47 | v21.24,51.22 20.49,51.97 20.49,52.34 19.99,52.84 U1.7 19.86,52.97 19.86,54.47 v19.36,54.97 | 42.74,46.97 v41.24,46.97 | v7.61,79.47 7.61,89.47 5.24,89.47 J2.P3
  Bottom 0.15: 88.74,63.22 81.36,70.59 v80.74,70.59 | 88.74,63.22 v94.86,57.09 | v112.11,13.84 106.24,13.84 v105.99,14.09 | v104.36,14.09 103.61,14.09 101.86,15.84 v63.36,15.84 | v21.24,51.22 36.99,51.22 v41.24,46.97 | v7.61,79.47 19.36,67.72 v19.36,54.97 | 88.74,63.22 85.99,60.47 v45.61,60.47
N$1  (via drill 0.3)
  Top 0.15: v159.74,49.84 157.11,47.22 R2.2 | v165.49,53.22 165.24,53.47 164.61,53.47 J1.A5
  Bottom 0.15: v159.74,49.84 162.11,49.84 v165.49,53.22
N$2  (via drill 0.3)
  Top 0.15: v155.11,47.84 155.74,48.47 R3.1 | v166.24,55.47 165.24,56.47 164.61,56.47 J1.B5
  Bottom 0.15: v155.11,47.84 162.36,47.84 166.24,51.72 v166.24,55.47
N$3
  Top 0.15: J3.24 107.86,15.22 107.86,18.84 C11.1
N$12  (via drill 0.3)
  Top 0.15: 49.11,100.22 48.49,100.22 IC1.3 | 49.11,100.22 49.11,101.59 48.74,101.97 48.49,101.97 IC1.1 | 49.11,100.22 v49.36,100.22 | C4.1 54.74,96.09 v53.49,96.09 52.49,95.09 52.49,60.09 v70.11,42.47 | v121.49,40.72 121.49,39.59 124.11,39.59 124.49,39.97 124.49,40.34 125.99,41.84 D2.1 | v105.11,24.97 104.61,24.47 104.61,24.22 Q1.2
  Bottom 0.15: v49.36,100.22 v53.49,96.09 | v121.49,40.72 120.86,40.72 v105.11,24.97 87.61,42.47 v70.11,42.47
N$43
  Top 0.15: R6.2 122.61,27.72 132.36,37.47 132.36,48.34 131.49,49.22 131.49,49.34 U2.1
N$44  (via drill 0.3)
  Top 0.15: v102.61,21.22 101.86,20.47 LED1.C | v121.86,25.72 122.49,26.34 R6.1
  Bottom 0.15: v102.61,21.22 108.11,21.22 112.61,25.72 v121.86,25.72
N$45
  Top 0.15: R7.2 128.24,49.97 130.86,52.59 131.36,52.59 131.36,52.22 U2.5
N$49  (via drill 0.3)
  Top 0.15: v43.74,91.34 28.11,106.97 C9.1 | v103.74,57.97 120.11,41.59 120.11,27.22 D4.2 120.11,27.09 116.74,23.72 D3.1
  Bottom 0.15: v43.74,91.34 61.86,91.34 80.86,72.34 84.99,72.34 99.36,57.97 v103.74,57.97
N$60
  Top 0.15: J3.22 108.86,15.22 108.86,18.22 108.61,18.47 108.61,19.47 109.24,20.09 C13.2
N$62
  Top 0.15: J3.20 109.86,15.09 109.86,14.59 107.24,11.97 106.49,11.97 106.49,21.59 107.11,22.22 107.11,22.59 107.99,23.47 112.24,23.47 112.24,20.34 C15.2
N$63  (via drill 0.3)
  Top 0.15: v110.61,15.97 110.61,15.34 110.49,15.22 J3.19 | C16.2 v114.61,19.59
  Bottom 0.15: v110.61,15.97 110.99,15.97 111.74,15.22 112.24,15.22 114.61,17.59 v114.61,19.59
N$64  (via drill 0.3)
  Top 0.15: v111.11,14.34 111.11,14.97 110.99,15.09 J3.18 | v116.11,19.59 115.36,20.34 C17.2
  Bottom 0.15: v111.11,14.34 111.86,14.34 116.11,18.59 v116.11,19.59
N$66  (via drill 0.3)
  Top 0.15: v117.86,18.22 117.86,15.22 J3.4 | v117.49,19.59 116.86,20.22 C19.2
  Bottom 0.15: v117.86,18.22 117.86,19.22 v117.49,19.59
N$75
  Top 0.15: J3.5 117.49,15.09 117.61,14.97 117.61,14.47 120.11,11.97 120.99,11.97 120.99,17.47 118.24,20.22 C20.2
N$85
  Top 0.15: C23.1 123.99,42.34 125.36,42.34 125.36,42.47 126.24,43.34 127.74,43.34 127.74,43.84 129.24,45.34 131.61,45.34 131.61,43.97 IC2.5
N$98
  Top 0.15: D6.1 88.61,64.97 90.11,66.47 90.11,68.84 90.49,69.22 92.11,69.22 92.11,67.22 99.49,59.84 122.11,59.84 123.11,58.84 123.11,51.47 R18.1
PREVGH  (via drill 0.3)
  Top 0.15: v109.36,15.97 109.36,15.22 J3.21 | v105.99,15.97 106.11,16.09 106.11,22.34 106.74,22.97 106.74,28.72 | D5.1 106.74,28.72 | 106.74,28.72 101.86,23.84 C14.2
  Bottom 0.15: v105.99,15.97 v109.36,15.97
PREVGL  (via drill 0.3)
  Top 0.15: v107.99,13.34 108.36,13.72 108.36,15.09 J3.23 | v119.11,23.47 120.11,23.47 120.11,23.59 D3.2 | v109.99,22.47 109.99,21.09 110.74,20.34 C12.2
  Bottom 0.15: v107.99,13.34 112.24,13.34 113.11,14.22 113.11,15.09 116.99,18.97 116.99,21.34 117.61,21.97 | v119.11,23.47 117.61,21.97 | v109.99,22.47 110.24,22.72 110.24,22.84 112.74,25.34 114.24,25.34 117.61,21.97
RESE  (via drill 0.3)
  Top 0.15: v118.49,14.34 118.49,15.09 J3.3 | v103.11,13.97 102.61,14.47 102.61,15.97 R9.2 102.49,16.09 102.49,16.72 101.24,16.72 100.74,17.22 100.24,17.22 99.11,16.09 99.11,15.97 98.74,15.59 Q2.2
  Bottom 0.15: v118.49,14.34 116.49,12.34 104.74,12.34 v103.11,13.97
RESE'
  Top 0.15: SJ1.2 99.11,11.97 99.11,12.59 100.74,12.59 R10.2 100.86,12.72 100.86,15.59 101.24,15.97 R9.1
RESET  (via drill 0.3)
  Top 0.15: R15.1 127.74,38.47 127.74,42.84 128.86,43.97 IC2.1 128.99,43.97 v129.86,44.84 | v147.24,49.22 C24.1 | U$1.4 22.61,109.09 25.99,109.09 U$1.3 26.11,109.09 27.11,108.09 27.11,106.84 29.74,104.22 29.74,84.22 | v19.86,64.59 19.86,58.47 15.36,53.97 15.36,53.47 14.86,52.97 U1.3 | v19.86,72.59 29.74,82.47 29.74,84.22 | 29.74,84.22 v42.49,71.47
  Bottom 0.15: v147.24,49.22 136.49,49.22 136.24,48.97 | 136.24,48.97 132.11,44.84 v129.86,44.84 | v19.86,72.59 v19.86,64.59 | 136.24,48.97 132.36,52.84 101.99,52.84 88.49,66.34 88.49,67.47 84.49,71.47 v42.49,71.47
RTC_RST  (via drill 0.3)
  Top 0.15: v29.74,67.97 28.11,69.59 28.11,69.84 27.61,70.34 U1.16 | v86.61,62.34 87.11,61.84 87.11,61.09 U5.4
  Bottom 0.15: v29.74,67.97 80.99,67.97 v86.61,62.34
RX  (via drill 0.3)
  Top 0.15: v29.24,82.59 17.86,71.22 17.86,70.84 17.49,70.47 U1.24 | v60.36,82.59 78.24,100.47 79.61,100.47 TP2.TP
  Bottom 0.15: v60.36,82.59 v29.24,82.59
SCK  (via drill 0.3)
  Top 0.15: 44.24,60.47 41.24,57.47 v41.24,56.34 | 44.24,60.47 44.86,61.09 U6.6 | v38.61,53.72 37.74,52.84 D9.1 37.61,52.72 37.61,51.59 36.74,51.59 36.49,51.84 v36.24,51.84 | v19.24,51.84 19.24,52.34 18.74,52.84 U1.6 | v9.49,91.72 5.24,91.72 J2.P5 | v37.74,69.34 44.24,62.84 44.24,60.47 | v113.61,14.34 113.61,14.97 113.49,15.09 J3.13 | R23.1 v158.86,4.72 | v146.74,14.84 146.74,58.72 TP11.TP | v108.49,44.72 113.36,39.84 v113.36,26.22
  Bottom 0.15: v41.24,56.34 v38.61,53.72 38.61,52.47 46.36,44.72 v108.49,44.72 | v36.24,51.84 v19.24,51.84 | v9.49,91.72 31.86,69.34 v37.74,69.34 | v113.61,14.34 117.86,14.34 118.36,14.84 122.36,14.84 | 122.36,14.84 v146.74,14.84 148.74,14.84 v158.86,4.72 | v113.36,26.22 121.99,26.22 122.36,25.84 122.36,14.84
SCL  (via drill 0.3)
  Top 0.15: 163.61,10.47 163.61,5.59 162.86,4.84 R13.1 | 163.61,10.47 163.24,10.84 U3.4 | v142.61,42.97 142.61,46.09 | 142.61,46.09 142.61,51.47 141.74,51.47 U4.7 | v164.24,21.34 165.24,21.34 165.24,21.22 J4.4 165.36,21.09 165.74,21.09 166.61,20.22 166.61,11.59 165.49,10.47 163.61,10.47 | v23.74,68.84 22.99,69.59 22.99,69.84 22.49,70.34 U1.20 | v87.36,62.47 87.99,61.84 87.99,55.59 90.99,52.59 | 90.99,52.59 90.99,51.84 U5.16 90.99,52.59 | 142.61,46.09 135.61,46.09 v135.61,48.97 | v92.86,60.34 90.99,58.47 90.99,52.59
  Bottom 0.15: v164.24,21.34 v142.61,42.97 | v23.74,68.84 80.99,68.84 v87.36,62.47 | v135.61,48.97 135.24,48.97 131.74,52.47 100.74,52.47 v92.86,60.34
SDA  (via drill 0.3)
  Top 0.15: 142.61,42.34 143.11,42.84 143.11,51.97 141.74,51.97 U4.8 | 142.61,42.34 141.86,42.34 R14.1 | 166.24,17.47 166.24,12.47 165.49,11.72 163.24,11.72 U3.3 | 166.24,17.47 166.24,19.59 165.74,20.09 165.36,20.09 J4.3 | 142.61,42.34 146.24,38.72 v146.24,37.34 | 166.24,17.47 v166.11,17.47 | v29.24,65.72 27.49,65.72 24.24,68.97 24.24,69.84 23.74,70.34 U1.19 | v82.36,62.47 82.86,61.97 82.86,58.97 85.49,56.34 | 85.49,56.34 89.74,52.09 89.74,51.84 U5.15 | v133.99,42.97 132.86,44.09 v132.86,46.22 | 85.49,56.34 v85.74,56.59
  Bottom 0.15: v166.11,17.47 v146.24,37.34 139.61,37.34 v133.99,42.97 | v29.24,65.72 79.11,65.72 v82.36,62.47 | v132.86,46.22 104.61,46.22 94.24,56.59 v85.74,56.59
SRC  (via drill 0.3)
  Top 0.15: v100.61,16.72 100.61,16.47 99.74,15.59 Q2.3 | v112.49,23.84 111.49,24.84 111.49,29.84 D5.2 111.36,29.97 110.74,30.59 110.74,37.47 L1.1 110.61,37.59 107.99,40.22 107.99,49.97 v99.49,58.47 | v44.24,108.34 28.11,108.34 C9.2
  Bottom 0.15: v100.61,16.72 110.74,16.72 111.86,15.59 112.11,15.59 112.49,15.97 v112.49,23.84 | v44.24,108.34 49.61,108.34 v99.49,58.47
SS_SD  (via drill 0.3)
  Top 0.15: v94.11,54.97 94.11,60.72 94.61,61.22 R26.1 | v46.11,45.59 45.99,45.47 45.99,44.09 | 45.99,44.09 45.99,29.72 45.24,28.97 D12.1 | v16.86,51.84 16.61,52.09 16.61,52.34 16.11,52.84 U1.4 16.11,52.97 16.11,54.09 v16.74,54.72 | 45.99,44.09 v44.24,44.09 | v7.11,77.97 7.11,86.97 5.61,88.47 J2.P2
  Bottom 0.15: v94.11,54.97 80.24,54.97 70.86,45.59 v46.11,45.59 | v16.86,51.84 18.61,51.84 26.36,44.09 v44.24,44.09 | v7.11,77.97 7.11,77.72 16.74,68.09 v16.74,54.72
TX  (via drill 0.3)
  Top 0.15: v29.24,83.84 16.61,71.22 16.61,70.97 16.11,70.47 U1.25 | v56.86,83.84 73.61,100.59 TP1.TP
  Bottom 0.15: v56.86,83.84 v29.24,83.84
USB_D+  (via drill 0.3)
  Top 0.15: v150.61,51.59 150.61,50.22 152.99,50.22 D1.3 | v32.99,71.97 32.36,71.34 32.36,56.47 28.86,52.97 U1.14
  Bottom 0.15: v150.61,51.59 139.24,51.59 133.36,57.47 98.99,57.47 84.49,71.97 v32.99,71.97
USB_D-  (via drill 0.3)
  Top 0.15: v151.36,52.09 152.99,52.09 D1.1 | v87.36,71.22 81.74,65.59 v81.74,62.47 | v31.86,63.47 27.61,59.22 27.61,52.97 U1.13
  Bottom 0.15: v151.36,52.09 139.24,52.09 124.36,66.97 91.61,66.97 v87.36,71.22 | v81.74,62.47 43.11,62.47 42.11,63.47 v31.86,63.47
VBAT  (via drill 0.3)
  Top 0.15: C8.1 100.61,22.09 v100.61,21.72 | v104.61,21.72 105.24,21.72 105.24,21.97 Q1.3 | U4.2 139.86,51.47 139.86,51.09 U4.3 139.74,51.09 139.11,51.72 139.11,54.72 | 135.86,54.72 135.49,54.34 135.49,53.22 133.49,51.22 133.49,49.59 133.36,49.47 U2.3 | 139.11,54.72 135.86,54.72 | 139.11,54.72 139.11,56.97 146.61,64.47 TP3.TP | v123.11,41.72 123.24,41.84 123.24,49.09 125.24,51.09 125.24,54.34 126.86,55.97 134.99,55.97 135.86,55.09 135.86,54.72
  Bottom 0.15: v100.61,21.72 v104.61,21.72 104.61,23.22 v123.11,41.72
VBUS  (via drill 0.3)
  Top 0.3: Q1.1 105.42,23.66 | 105.42,23.66 103.99,22.22 103.99,21.09 103.36,20.47 LED1.A 103.36,20.34 104.36,19.34 104.36,17.47 103.74,16.84 103.74,4.47 101.74,2.47 TP17.TP | v108.11,22.97 108.99,22.09 R4.2 | 105.42,23.66 v106.11,22.97 | 154.49,50.97 154.49,46.34 155.99,44.84 R1.2 | 154.49,50.97 154.49,51.09 155.49,51.09 D1.5 | v132.11,53.34 133.24,52.22 U2.4 | v128.11,53.34 127.49,53.97 C7.1 127.36,53.97 126.24,52.84 126.24,44.22 126.11,44.09 D2.2 125.99,43.84 v125.11,42.97 | v154.11,50.97 154.49,50.97
  Bottom 0.3: v106.11,22.97 v108.11,22.97 108.11,25.97 v125.11,42.97 | v128.11,53.34 v132.11,53.34 132.36,53.34 134.74,50.97 v154.11,50.97
VRTC
  Top 0.15: 96.74,51.72 97.24,51.22 C28.2 96.74,51.72 | 96.74,51.72 96.11,52.34 96.11,58.97 103.99,58.97 112.11,50.84 112.11,50.72 123.74,50.72 124.36,51.34 R18.2 | 88.49,47.84 88.49,25.34 48.86,25.34 C27.1 | 88.49,47.84 88.49,51.72 U5.14 | 96.74,51.72 92.86,47.84 88.49,47.84
VUSB  (via drill 0.3)
  Top 0.3: J1.A4 164.49,52.34 164.49,52.47 J1.B9 164.36,52.47 163.49,52.47 | J1.A9 164.49,57.34 164.49,57.09 J1.B4 164.36,57.09 163.86,57.09 163.36,56.59 163.36,52.47 163.49,52.47 | v152.74,46.47 151.61,45.34 151.61,44.84 R1.1 | v163.49,52.34 163.49,52.47
  Bottom 0.3: v163.49,52.34 158.61,52.34 v152.74,46.47